# Altium PCB CO001_Beeper_V1.PcbDoc
Units mm, origin at the board's own origin, x right, y up, seen from the top; angles counter-clockwise.
Board outline 60 x 90 mm, 2 copper layers (Top Layer, Bottom Layer); 17 components, 32 nets, 93 pads, 34 vias.
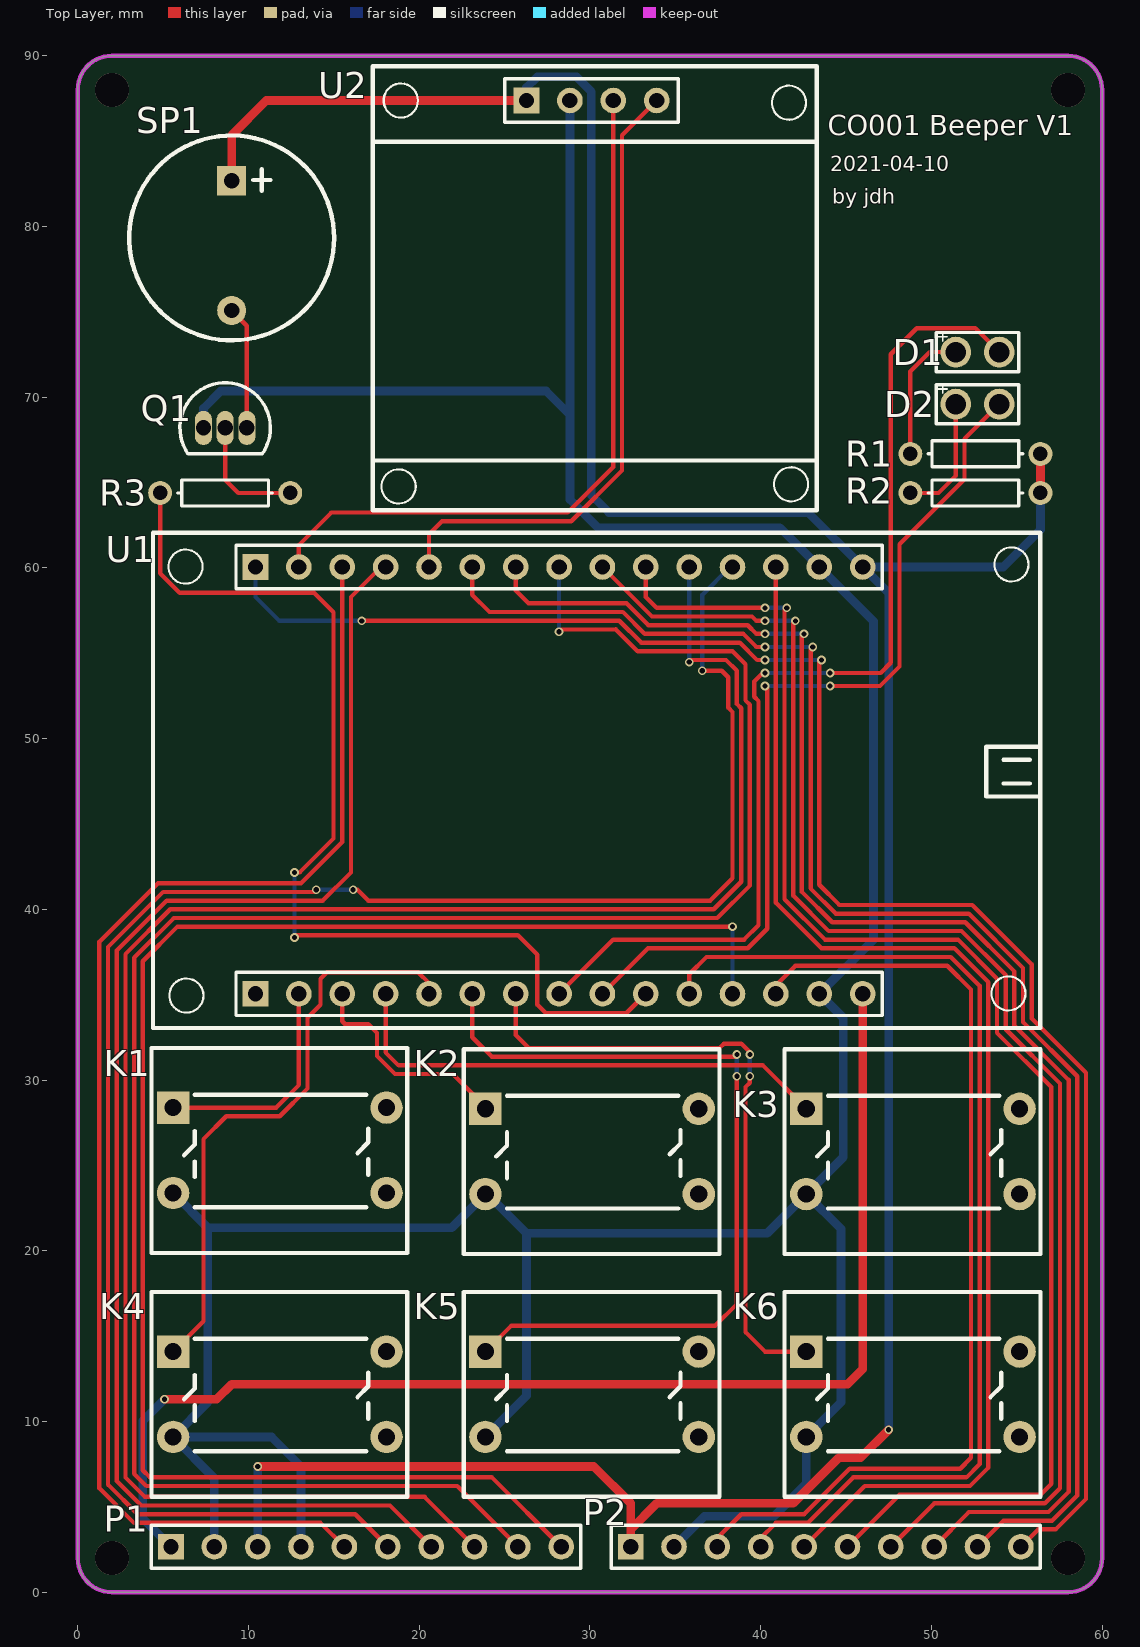
[diagram p0: Top Layer view]
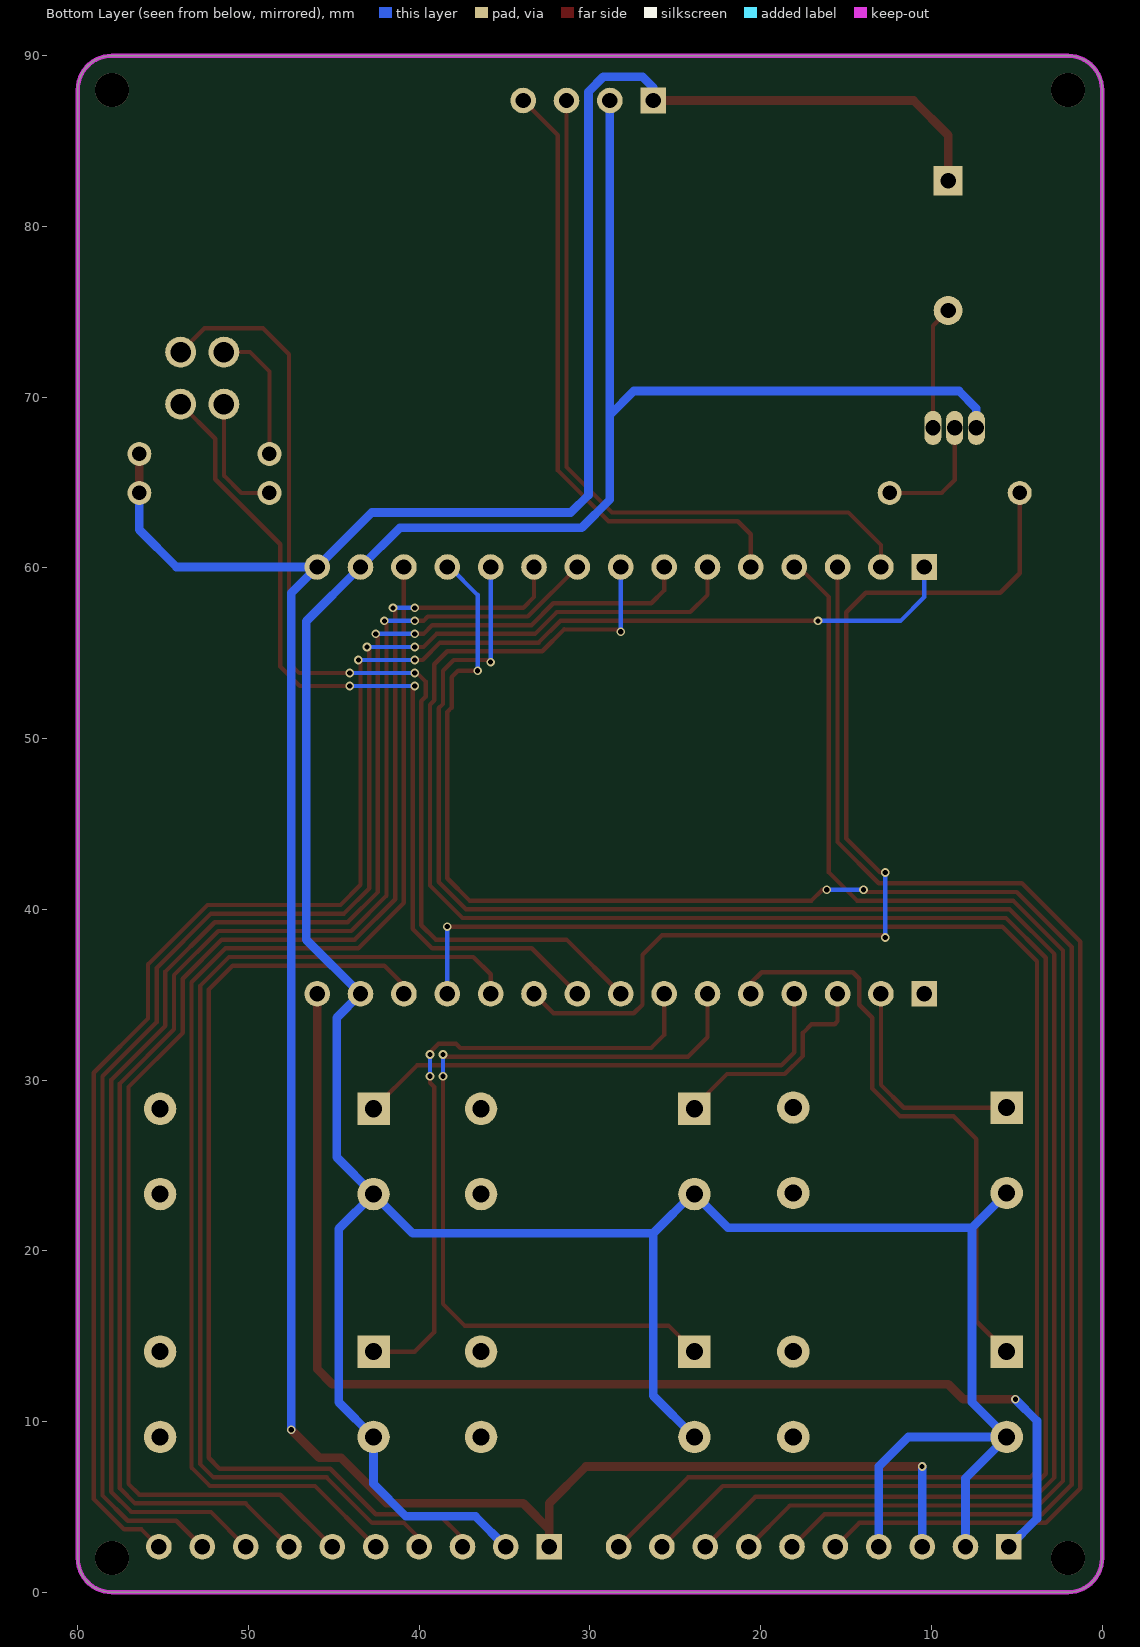
[diagram p1: Bottom Layer view, seen from below]

## Layer stack, top to bottom
Top Solder: solder mask 0.0102, Solder Resist, Dk 3.5
Top Layer: signal copper 0.0356
Dielectric 1: dielectric 0.32, FR-4, Dk 4.8
Bottom Layer: signal copper 0.0356
Bottom Solder: solder mask 0.0102, Solder Resist, Dk 3.5

## Board outline
2,0 cw(c2,2) 0,2 0,88 cw(c2,88) 2,90 58,90 cw(c58,88) 60,88 60,2 cw(c58,2) 58,0

## Design rules (kind name [scope] priority, off if disabled: settings)
Clearance [All] p1: gap=0.254
HoleToHoleClearance [All] p1: gap=0 allowstackedmicrovias=TRUE
MinimumSolderMaskSliver [All] p1: minsoldermaskwidth=0
PolygonConnect [All] p1: connectstyle=Relief reliefconductorwidth=0.254 reliefentries=4 polygonreliefangle="90 Angle" airgapwidth=0.254
RoutingVias [All] p1: holewidth=0.711 width=1.27 viastyle="Through Hole" minholewidth=0.254 minwidth=0.254 maxholewidth=25.4 maxwidth=25.4
SilkToSilkClearance [All] p1: silktosilkclearance=0
SilkToSolderMaskClearance [IsPad] p1: minsilkscreentomaskgap=0 clearancetoexposedcopper=TRUE
SolderMaskExpansion [All] p1: expansion=0.102
Width [All] p1: maxlimit=25.4 minlimit=0.254 preferedwidth=0.254
26 further rules are at their usual default settings.

## Components (designator, comment, footprint, x,y, rotation, side; value= is the part's Value field where it differs from the comment)
D1 "红色LED" LED_3mm 51.435,72.644 r0 top
D2 "绿色LED" LED_3mm 51.435,69.596 r0 top
K1 "KEY_12x12x7.3" KEY-12x12 5.588,28.386 r0 top
K2 "KEY_12x12x7.3" KEY-12x12 23.876,28.321 r0 top
K3 "KEY_12x12x7.3" KEY-12x12 42.672,28.321 r0 top
K4 "KEY_12x12x7.3" KEY-12x12 5.588,14.097 r0 top
K5 "KEY_12x12x7.3" KEY-12x12 23.876,14.097 r0 top
K6 "KEY_12x12x7.3" KEY-12x12 42.672,14.097 r0 top
P1 "Header10" HDR1X10_2.54 5.461,2.667 r0 top
P2 "Header10" HDR1X10_2.54 32.385,2.667 r0 top
Q1 "S8050" TO-226-AA 7.366,68.199 r0 top
R1 "1K" AXIAL-0.3 48.768,66.675 r0 top
R2 "1K" AXIAL-0.3 48.768,64.389 r0 top
R3 "1K" AXIAL-0.3 12.446,64.389 r180 top
SP1 "蜂鸣器" BUZZER-12095-3V 9.017,82.677 r0 top
U1 "Esp32 DevKitV1" Esp32DevKitV1 10.414,35.052 r90 top locked
U2 "oled 0.96" oled0.96i2c 26.289,87.376 r0 top

## Footprints (in the part's own frame and the unit in brackets; to place one, negate y for a bottom-side part, rotate by r counter-clockwise, add the part's x,y. Pads: shape width x height; smd on the part's side, far side on the other; paste and mask are expansions set on the pad)
AXIAL-0.3 [mm]
  round 1.4 hole 0.85: 1(0,0) 2(7.62,0)
  silkscreen extent 1.04,-0.76 6.58,0.76
BUZZER-12095-3V [mm]
  rect 1.7x1.7 hole 0.9: 1(0,0)
  round 1.7 hole 0.9: 2(0,-7.6)
  silkscreen extent -6,-9.35 6,2.65, body extent -4.4,-7.79 4.4,1.01, height 5
Esp32DevKitV1 [mm]
  rect 1.5x1.5 hole 0.9: 1(0,0) 16(25,0)
  round 1.5 hole 0.9: 2(0,-2.54) 3(0,-5.08) 4(0,-7.62) 5(0,-10.16) 6(0,-12.7) 7(0,-15.24) 8(0,-17.78) 9(0,-20.32) 10(0,-22.86) 11(0,-25.4) 12(0,-27.94) 13(0,-30.48) 14(0,-33.02) 15(0,-35.56) 17(25,-2.54) 18(25,-5.08) 19(25,-7.62) 20(25,-10.16) 21(25,-12.7) 22(25,-15.24) 23(25,-17.78) 24(25,-20.32) 25(25,-22.86) 26(25,-25.4) 27(25,-27.94) 28(25,-30.48) 29(25,-33.02) 30(25,-35.56)
  silkscreen extent -2,-45.97 27,6, body extent -1.27,-36.83 26.27,1.27, height 8.54
HDR1X10_2.54 [mm]
  rect 1.5x1.5 hole 0.9: 1(0,0)
  round 1.5 hole 0.9: 2(2.54,0) 3(5.08,0) 4(7.62,0) 5(10.16,0) 6(12.7,0) 7(15.24,0) 8(17.78,0) 9(20.32,0) 10(22.86,0)
  silkscreen extent -1.14,-1.27 24,1.27, body extent -1.27,-1.27 24.13,1.27, height 8.54
KEY-12x12 [mm]
  rect 1.9x1.9 hole 1: 1(0,0)
  round 1.9 hole 1: 2(0,-5) 3(12.5,-5) 4(12.5,0)
  silkscreen extent -1.27,-8.51 13.72,3.49, body extent 2.33,-5.54 10.54,0.46, height 5.95
LED_3mm [mm]
  round 1.8 hole 1.2: 1(0,0) 2(2.54,0)
  silkscreen extent -1.14,-1.14 3.68,1.14
oled0.96i2c [mm]
  rect 1.5x1.5 hole 0.9: 1(0,0)
  round 1.5 hole 0.9: 2(2.54,0) 3(5.08,0) 4(7.62,0)
  silkscreen extent -9,-24 17,2, body extent -1.27,-1.27 8.89,1.27, height 8.54
TO-226-AA [mm]
  oval 1x2 hole 0.9: 1(0,0) 2(1.27,0) 3(2.54,0)
  silkscreen extent -1.38,-1.52 3.92,2.65, body extent -1.39,-1.52 3.93,2.66, height 5.33

## Part data
D1 D2: library part LED
R1 R2 R3: library part 电阻
SP1: library part BUZZER-12095-3V
U1: library part Esp32DevKitV1
U2: library part oled0.96i2c

## Via types
v1: diameter 0.508, hole 0.305, Top Layer to Bottom Layer, 30 vias
v2: diameter 2, hole 2, Top Layer to Bottom Layer, 4 vias

## Nets (pads, with @x,y where several pads share a name; then routed paths per layer and width w, separated by ;. In a path a pad name is that pad's centre, name@x,y a point inside that pad or via, vN(x,y) a via of type N, cw(c..) or ccw(c..) an arc to the next point about the centre after c; other vN are vias at no path point)
3V3: P1.3 P2.1 R1.2 R2.2 SP1.1 U1.30 U2.1 | length 181.7
  Top Layer w0.508: SP1.1 9.017,85.344 11.049,87.376 U2.1 ; v1(10.541,7.366) 30.226,7.366 32.385,5.207 32.385,3.683 ; P2.1 32.385,3.683 ; v1(47.498,9.525) 45.847,7.874 44.577,7.874 41.91,5.207 33.909,5.207 32.385,3.683 ; R2.2 R1.2
  Bottom Layer w0.508: P1.3 v1(10.541,7.366) ; U2.1 26.289,88.138 26.924,88.773 29.211,88.773 30.087,87.897 30.087,64.274 31.115,63.246 42.78,63.246 U1.30 ; v1(47.498,9.525) 47.498,58.528 U1.30 ; R2.2 56.388,62.23 54.21,60.052 U1.30
5V: P1.1 U1.15 | length 73.4
  Top Layer w0.508: v1(5.08,11.303) 8.128,11.303 9.017,12.192 45.085,12.192 45.974,13.081 U1.15
  Bottom Layer w0.508: v1(5.08,11.303) 3.81,10.033 3.81,4.318 P1.1
BEEP: R3.2 U1.10 | length 60.7
  Top Layer w0.254: R3.2 4.826,59.69 5.969,58.547 13.843,58.547 14.986,57.404 14.986,44.152 12.998,42.164 v1(12.7,42.164) ; v1(12.7,38.354) 12.827,38.481 25.781,38.481 26.924,37.338 26.924,34.417 27.432,33.909 32.131,33.909 U1.10
  Bottom Layer w0.254: v1(12.7,38.354) v1(12.7,42.164)
GND: K1.2 K2.2 K3.2 K4.2 K5.2 K6.2 P1.2 P1.4 P2.2 Q1.1 U1.14 U1.29 U2.2 | length 219
  Bottom Layer w0.508: K1.2 7.62,21.354 ; Q1.1 7.366,69.342 8.382,70.358 27.432,70.358 28.829,68.961 ; P1.2 8.001,6.684 K4.2 ; P1.4 13.081,7.366 11.35,9.097 K4.2 ; K5.2 26.289,11.51 26.289,21.035 ; K2.2 21.909,21.354 7.62,21.354 ; K2.2@23.876,23.448 26.289,21.035 ; U2.2 28.829,68.961 ; P2.2 36.703,4.445 40.767,4.445 42.672,6.35 K6.2 44.704,11.129 44.704,21.289 K3.2 ; K4.2 7.62,11.129 7.62,21.354 ; 26.289,21.035 40.386,21.035 K3.2 ; 28.829,68.961 28.829,64.008 30.48,62.357 41.129,62.357 U1.29 46.609,56.877 46.609,38.227 U1.14 44.831,33.655 44.831,25.48 K3.2
GPIO1: P1.5 U1.18 | length 80.5
  Top Layer w0.254: U1.18 15.494,43.942 13.081,41.529 4.699,41.529 1.27,38.1 1.27,6.096 3.302,4.064 14.224,4.064 P1.5
GPIO2: P1.6 U1.27 | length 108.6
  Top Layer w0.254: v1(13.97,41.148) 13.843,41.021 5,41.021 1.778,37.799 1.778,6.306 3.512,4.572 16.256,4.572 P1.6 ; v1(16.129,41.148) 16.383,41.148 17.018,40.513 37.044,40.513 38.354,41.823 38.354,51.562 38.1,51.816 38.1,53.594 37.719,53.975 v1(36.576,53.975)
  Bottom Layer w0.254: v1(13.97,41.148) v1(16.129,41.148) ; v1(36.576,53.975) 36.576,58.42 38.208,60.052 U1.27
GPIO3: P1.7 U1.19 | length 85.6
  Top Layer w0.254: U1.19 17.761,60.052 16.002,58.293 16.002,42.164 14.351,40.513 5.211,40.513 2.286,37.588 2.286,6.517 3.723,5.08 18.288,5.08 P1.7
GPIO4: P1.8 U1.26 | length 111.7
  Top Layer w0.254: P1.8 20.32,5.588 3.933,5.588 2.794,6.727 2.794,37.378 5.421,40.005 37.255,40.005 38.862,41.612 38.862,51.776 38.608,52.03 38.608,53.975 37.973,54.61 35.941,54.61 v1(35.814,54.483)
  Bottom Layer w0.254: v1(35.814,54.483) U1.26
GPIO5: P1.9 U1.23 | length 121
  Top Layer w0.254: P1.9 22.225,6.223 4.017,6.223 3.302,6.938 3.302,37.167 5.632,39.497 37.465,39.497 39.37,41.402 39.37,51.987 39.116,52.241 39.116,54.356 38.354,55.118 32.794,55.118 31.512,56.4 31.5,56.388 28.321,56.388 v1(28.194,56.261)
  Bottom Layer w0.254: v1(28.194,56.261) U1.23
GPIO12: P1.10 U1.12 | length 95.5
  Top Layer w0.254: P1.10 24.257,6.731 4.227,6.731 3.81,7.148 3.81,36.957 5.842,38.989 v1(38.354,38.989)
  Bottom Layer w0.254: U1.12 v1(38.354,38.989)
GPIO13: P2.3 U1.13 | length 57.7
  Top Layer w0.254: P2.3 37.465,3.175 38.862,4.572 42.545,4.572 45.212,7.239 51.689,7.239 52.324,7.874 52.324,35.306 50.927,36.703 42.037,36.703 40.894,35.56 U1.13
GPIO14: P2.4 U1.11 | length 62.4
  Top Layer w0.254: U1.11 35.814,36.195 36.83,37.211 51.137,37.211 52.832,35.516 52.832,7.513 52.05,6.731 45.422,6.731 42.755,4.064 40.894,4.064 40.005,3.175 P2.4
GPIO15: P2.5 U1.28 | length 75.2
  Top Layer w0.254: U1.28 40.894,40.386 43.561,37.719 51.348,37.719 53.34,35.727 53.34,7.302 52.261,6.223 46.101,6.223 P2.5
GPIO16: P2.6 U1.25 | length 86.1
  Top Layer w0.254: U1.25 33.274,58.293 33.909,57.658 v1(40.259,57.658) ; v1(41.529,57.658) 41.402,57.531 41.402,40.596 43.771,38.227 51.558,38.227 53.848,35.937 53.848,32.766 57.023,29.591 57.023,6.35 56.388,5.715 48.133,5.715 P2.6
  Bottom Layer w0.254: v1(40.259,57.658) v1(41.529,57.658)
GPIO17: P2.7 U1.24 | length 85.8
  Top Layer w0.254: U1.24 33.636,57.15 39.497,57.15 39.751,56.896 v1(40.259,56.896) ; v1(42.037,56.896) 41.91,56.769 41.91,40.807 43.982,38.735 51.769,38.735 54.356,36.148 54.356,32.976 57.531,29.801 57.531,6.092 56.646,5.207 50.165,5.207 P2.7
  Bottom Layer w0.254: v1(40.259,56.896) v1(42.037,56.896)
GPIO18: P2.8 U1.22 | length 89.9
  Top Layer w0.254: U1.22 25.654,58.674 26.404,57.924 32.143,57.924 33.426,56.642 39.243,56.642 39.751,56.134 v1(40.259,56.134) ; v1(42.545,56.134) 42.418,56.007 42.418,41.017 44.192,39.243 51.979,39.243 54.864,36.358 54.864,33.187 58.039,30.012 58.039,5.882 56.856,4.699 52.197,4.699 P2.8
  Bottom Layer w0.254: v1(40.259,56.134) v1(42.545,56.134)
GPIO19: P2.9 U1.21 | length 90.7
  Top Layer w0.254: U1.21 23.114,58.42 24.118,57.416 31.933,57.416 33.215,56.134 38.989,56.134 39.751,55.372 v1(40.259,55.372) ; v1(43.053,55.372) 42.926,55.245 42.926,41.228 44.403,39.751 52.19,39.751 55.372,36.569 55.372,33.397 58.547,30.222 58.547,5.671 57.067,4.191 54.229,4.191 P2.9
  Bottom Layer w0.254: v1(40.259,55.372) v1(43.053,55.372)
GPIO23: P2.10 U1.16 | length 101.6
  Top Layer w0.254: v1(16.637,56.896) 16.649,56.908 31.722,56.908 33.005,55.626 38.779,55.626 39.795,54.61 v1(40.259,54.61) ; v1(43.561,54.61) 43.434,54.483 43.434,41.438 44.613,40.259 52.4,40.259 55.88,36.779 55.88,33.608 59.055,30.433 59.055,5.461 57.277,3.683 56.261,3.683 P2.10
  Bottom Layer w0.254: U1.16 10.414,58.293 11.811,56.896 v1(16.637,56.896) ; v1(40.259,54.61) v1(43.561,54.61)
KEY1: K1.1 U1.2 | length 13.3
  Top Layer w0.254: K1.1 11.622,28.386 12.954,29.718 U1.2
KEY2: K2.1 U1.3 | length 12.9
  Top Layer w0.254: U1.3 15.494,33.445 15.665,33.274 17.018,33.274 17.526,32.766 17.526,31.413 18.586,30.353 21.971,30.353 K2.1@23.876,28.448
KEY3: K3.1 U1.4 | length 29.4
  Top Layer w0.254: U1.4 18.034,31.623 18.796,30.861 40.132,30.861 K3.1
KEY4: K4.1 U1.5 | length 34.7
  Top Layer w0.254: K4.1 7.366,15.875 7.366,26.543 8.701,27.878 11.832,27.878 13.462,29.508 13.462,33.655 14.224,34.417 14.224,35.941 14.605,36.322 19.939,36.322 20.574,35.687 U1.5
KEY5: K5.1 U1.6 | length 49.1
  Top Layer w0.254: U1.6 23.114,32.512 24.257,31.369 38.481,31.369 v1(38.608,31.496) ; K5.1 25.4,15.621 37.338,15.621 38.608,16.891 v1(38.608,30.226)
  Bottom Layer w0.254: v1(38.608,30.226) v1(38.608,31.496)
KEY6: K6.1 U1.7 | length 37.3
  Top Layer w0.254: U1.7 25.654,32.639 26.416,31.877 37.592,31.877 37.846,32.131 38.871,32.131 39.37,31.632 v1(39.37,31.496) ; v1(39.37,30.226) 39.37,29.845 39.116,29.591 39.116,15.24 40.259,14.097 K6.1
  Bottom Layer w0.254: v1(39.37,30.226) v1(39.37,31.496)
LED1: D1.2 U1.8 | length 61.8
  Top Layer w0.254: U1.8 31.369,38.227 39.033,38.227 39.878,39.072 39.878,52.197 39.624,52.451 39.624,53.349 40.123,53.848 v1(40.259,53.848) ; v1(44.069,53.848) 47.034,53.848 47.625,54.439 47.625,72.517 49.149,74.041 52.578,74.041 D1.2
  Bottom Layer w0.254: v1(40.259,53.848) v1(44.069,53.848)
LED2: D2.2 U1.9 | length 51.6
  Top Layer w0.254: U1.9 33.401,37.719 39.243,37.719 40.386,38.862 40.386,52.959 v1(40.259,53.086) ; v1(44.069,53.086) 46.99,53.086 48.133,54.229 48.133,61.385 51.943,65.195 51.943,67.564 D2.2
  Bottom Layer w0.254: v1(40.259,53.086) v1(44.069,53.086)
NetD1_1: D1.1 R1.1 | length 8
  Top Layer w0.254: R1.1 48.768,71.501 49.911,72.644 D1.1
NetD2_1: D2.1 R2.1 | length 7.3
  Top Layer w0.254: R2.1 50.419,64.389 51.435,65.405 D2.1
NetQ1_2: Q1.2 R3.1 | length 7.2
  Top Layer w0.254: Q1.2 8.636,65.151 9.398,64.389 R3.1
NetQ1_3: Q1.3 SP1.2 | length 7.2
  Top Layer w0.254: SP1.2 9.906,74.188 Q1.3
SCL: U1.17 U2.3 | length 43.1
  Top Layer w0.254: U1.17 12.954,61.341 14.859,63.246 28.702,63.246 31.369,65.913 U2.3
SDA: U1.20 U2.4 | length 37.3
  Top Layer w0.254: U1.20 20.574,61.976 21.336,62.738 28.912,62.738 31.877,65.703 31.877,85.344 U2.4
pads on no net: K1.3 K1.4 K2.3 K2.4 K3.3 K3.4 K4.3 K4.4 K5.3 K5.4 K6.3 K6.4 U1.1
copper on no net:
  other v2: 2,2 58,2 2,88 58,88

## Keep-outs
Keep-Out Layer:
  the board outline again, w0.254

## Silkscreen, mask and mechanical layers (free items; w line width, h text height)
Top Overlay:
  text "CO001 Beeper V1" at 43.942,84.963 h2
  text "2021-04-10" at 44.069,82.931 h1.5
  text "by jdh" at 44.196,81.026 h1.5